# EAGLE board 2rfm69 (EAGLE 6.5.0)
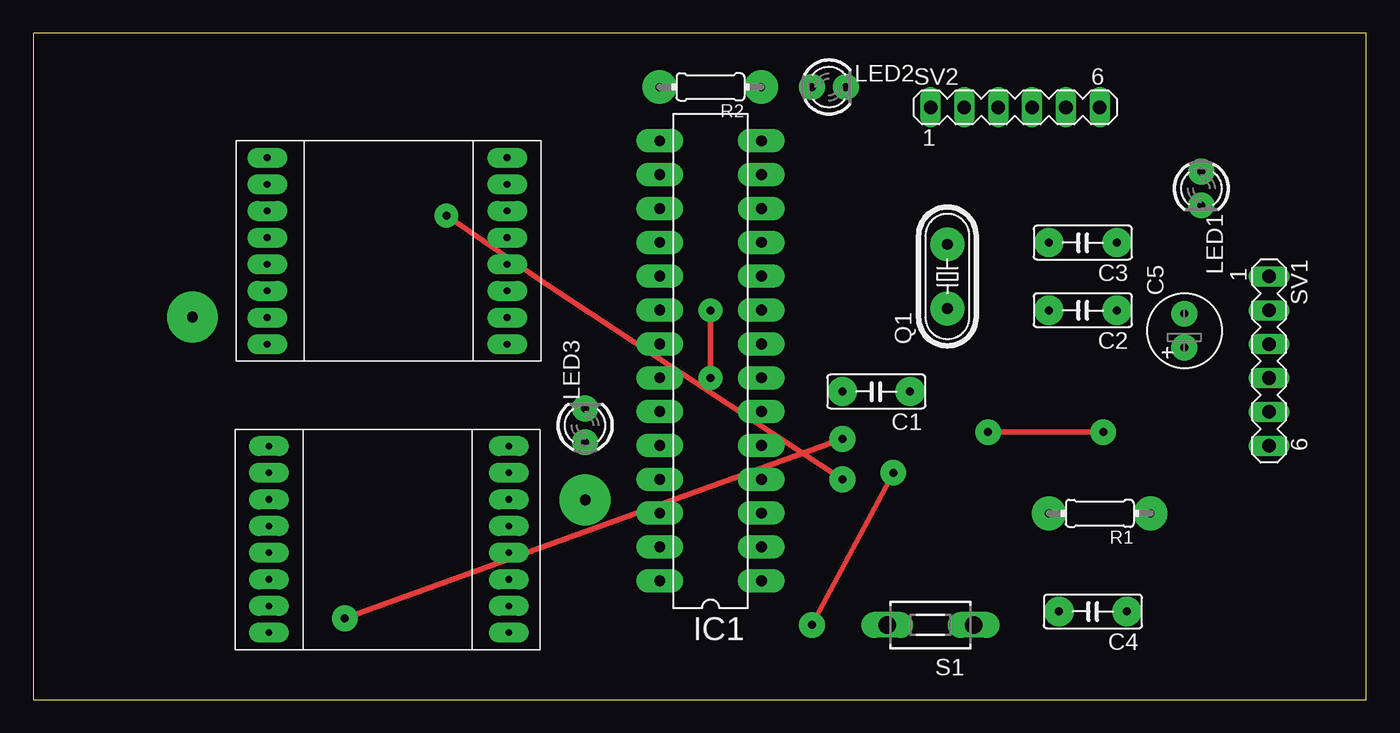
[diagram p0: board, top side]
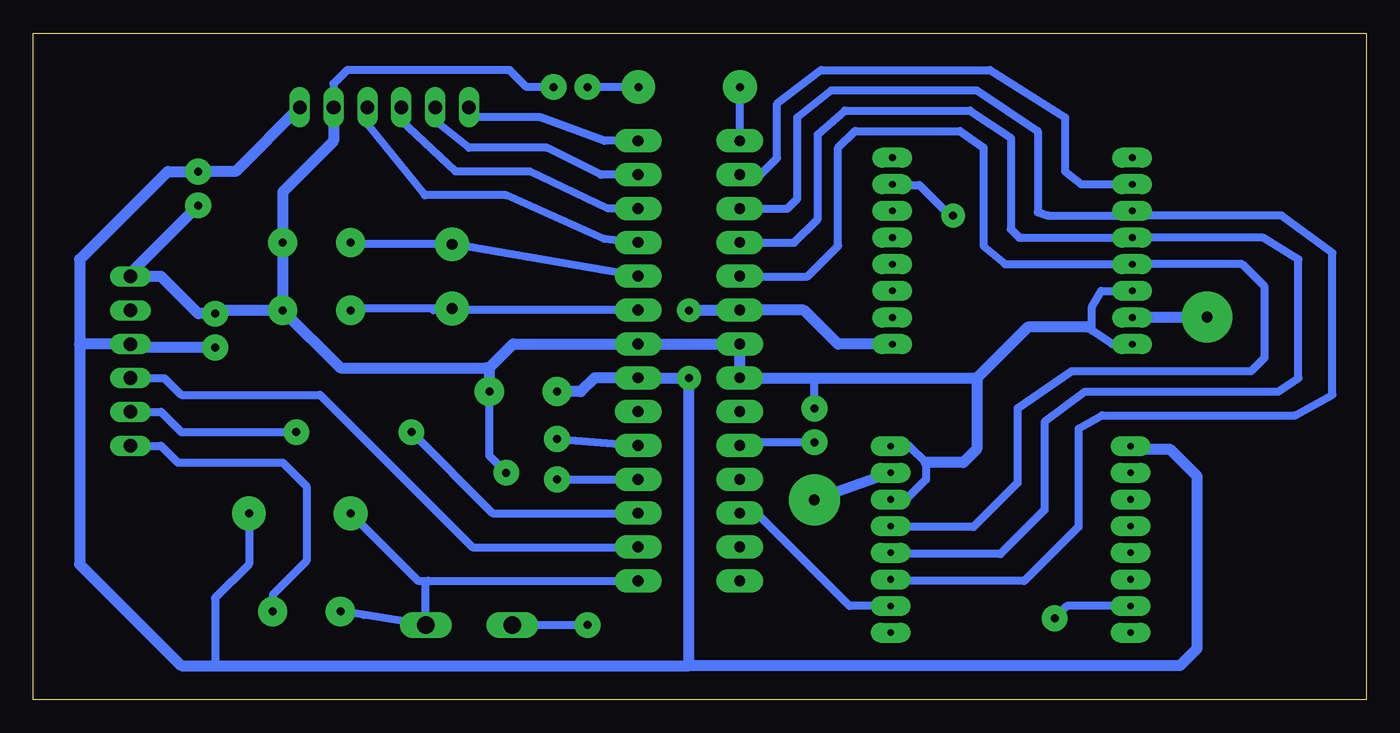
[diagram p1: board, bottom side, seen from below]

Size 100 x 50 mm. Coordinates in mm from the lower left corner, seen from the top.
Outline: 0,0 100,0 100,50 0,50 0,0
Copper layers (1*16): Top 0.035mm / dielectric 1.5mm / Bottom 0.035mm
Design rules "default": minimum track width 10mil, minimum drill 24mil, track to track 8mil, track to pad 8mil, pad to pad 8mil, via to via 8mil, smd to smd 8mil, copper to edge 40mil, drill to drill 8mil, minimum pad ring 10mil, minimum via ring 8mil, stop-mask expansion 4mil, vias tented up to drill 0mil, thermal gap 10mil

## Footprints (pad centres in the part's own frame; a part is rotated, then mirrored left to right if it is on the bottom)
C050-025X075 = drill 0.6 pad 2.184: 1 -2.54,0; 2 2.54,0
E2,5-6 = drill 0.6 pad 1.93: + -1.27,0; - 1.27,0
DIL28-3 = drill 0.813 pad 1.778 long: 1 -16.51,-3.81; 2 -13.97,-3.81; 3 -11.43,-3.81; 4 -8.89,-3.81; 5 -6.35,-3.81; 6 -3.81,-3.81; 7 -1.27,-3.81; 8 1.27,-3.81; 9 3.81,-3.81; 10 6.35,-3.81; 11 8.89,-3.81; 12 11.43,-3.81; 13 13.97,-3.81; 14 16.51,-3.81; 15 16.51,3.81; 16 13.97,3.81; 17 11.43,3.81; 18 8.89,3.81; 19 6.35,3.81; 20 3.81,3.81; 21 1.27,3.81; 22 -1.27,3.81; 23 -3.81,3.81; 24 -6.35,3.81; 25 -8.89,3.81; 26 -11.43,3.81; 27 -13.97,3.81; 28 -16.51,3.81
LED3MM = drill 0.6 pad 1.93: A -1.27,0; K 1.27,0
HC49/S = drill 0.813 pad 2.54: 1 -2.413,0; 2 2.413,0
0204/7 = drill 0.6 pad 2.54: 1 -3.81,0; 2 3.81,0
DTS-3 = drill 1.3 long: 1 -3.25,0; 2 3.25,0
MA06-1 = drill 1.016 long: 1 -6.35,0; 2 -3.81,0; 3 -1.27,0; 4 1.27,0; 5 3.81,0; 6 6.35,0
RFM69 = drill 0.5 pad 1.5 long: 1 -6.35,8.89; 2 -4.35,8.89; 3 -2.35,8.89; 4 -0.35,8.89; 5 1.65,8.89; 6 3.65,8.89; 7 5.65,8.89; 8 7.65,8.89; 9 7.65,-9.11; 10 5.65,-9.11; 11 3.65,-9.11; 12 1.65,-9.11; 13 -0.35,-9.11; 14 -2.35,-9.11; 15 -4.35,-9.11; 16 -6.35,-9.11
ANT = drill 0.8 pad 3.81: ANT 0,0

## Placement (x,y rotation side)
C1  0.1uF  [C050-025X075]  63.25,23.11 180 top
C2  22pF  [C050-025X075]  78.74,29.21 180 top
C3  22pF  [C050-025X075]  78.74,34.29 180 top
C4  0.1uF  [C050-025X075]  79.5,6.6 180 top
C5  10uF  [E2,5-6]  86.36,27.69 90 top
IC1  MEGA8-P  [DIL28-3]  50.81,25.42 90 top
LED1  [LED3MM]  87.63,38.35 270 top
LED2  [LED3MM]  59.69,45.97 0 top
LED3  [LED3MM]  41.4,20.57 90 top
Q1  16MHz  [HC49/S]  68.58,31.75 90 top
R1  10k  [0204/7]  80.01,13.97 180 top
R2  1k  [0204/7]  50.8,45.97 180 top
S1  DTS-3  [DTS-3]  67.31,5.59 180 top
SV1  [MA06-1]  92.71,25.4 270 top
SV2  [MA06-1]  73.66,44.45 0 top
U1  RFM692  [RFM69]  26.58,11.36 90 top
U2  RFM692  [RFM69]  26.66,34.31 270 top
U$1  ANT  [ANT]  11.94,28.7 0 top
U$2  ANT  [ANT]  41.4,14.99 0 top

## Library data of the parts
C1-C5 R1 R2 = rcl
IC1 = atmel; OC_FARNELL: unknown; OC_NEWARK: unknown
LED1-LED3 = led
Q1 = crystal; OC_FARNELL: 1667008; OC_NEWARK: unknown
S1 = switch-tact
SV1 SV2 = con-lstb; OC_FARNELL: unknown; OC_NEWARK: unknown
U1 U2 U$1 U$2 = rfm69

## Nets
+3V3: C1.2 C5.+ IC1.7 IC1.20 LED1.A R1.1 SV1.3 SV2.6 U1.8 U2.8
D0_RX: IC1.2 SV1.4
D1_TX: IC1.3 SV1.5
D2_INT2: IC1.4 U2.2
D3_INT1: IC1.5 U1.2
D5: IC1.11 SV2.4
D6: IC1.12 SV2.3
D7: IC1.13 SV2.2
D8: IC1.14 SV2.1
D9: IC1.15 R2.2
D10_SS2: IC1.16 U2.15
D11_MOSI: IC1.17 U1.14 U2.14
D12_MISO: IC1.18 U1.13 U2.13
D13_SCK: IC1.19 U1.12 U2.12
GND: C1.1 C2.1 C3.1 C5.- IC1.8 IC1.21 IC1.22 LED1.K LED2.K LED3.K S1.2 SV1.1 SV2.5 U1.9 U1.11 U2.9 U2.11
N$1: C2.2 IC1.9 Q1.1
N$2: C3.2 IC1.10 Q1.2
N$3: C4.1 SV1.6
N$4: U1.10 U$2.ANT
N$5: U2.10 U$1.ANT
N$6: LED2.A R2.1
N$7: IC1.24 LED3.A
RST: C4.2 IC1.1 R1.2 S1.1
SS1: IC1.26 U1.15

## Tracks (layer width: path | path; a pad name or v marks a point on that pad's centre or on a via)
+3V3  (via drill 0.6 pad 1.78)
  Top 0.406: v50.8,24.13 v50.8,29.21
  Bottom 0.406: U2.8 | U1.8 17.47,18.8 | 92.46,26.42 SV1.3 92.96,26.42 | IC1.7 54.6,24.13 | v50.8,29.21 50.53,29.23
  Bottom 0.61: R1.1 83.82,10.16 86.36,7.62 86.36,2.54
  Bottom 0.813: U2.8 39.62,26.67 42.18,29.23 IC1.20 50.53,29.23 | 17.47,18.8 14.73,18.8 12.7,16.76 12.7,3.81 13.97,2.54 50.8,2.54 | IC1.7 57.89,24.15 58.93,23.11 C1.2 | C5.+ 92.46,26.42 | 54.6,24.13 v50.8,24.13 50.8,2.54 | SV2.6 84.84,39.62 LED1.A 89.92,39.62 96.52,33.02 96.52,26.67 | 50.8,2.54 86.36,2.54 88.9,2.54 96.52,10.16 96.52,26.67 | SV1.3 96.52,26.67
D0_RX
  Bottom 0.406: 54.64,11.43 IC1.2
  Bottom 0.61: SV1.4 90.17,24.13 88.9,22.86 78.49,22.86 67.06,11.43 54.64,11.43
D1_TX  (via drill 0.6 pad 1.93)
  Top 0.406: v80.26,20.07 v71.63,20.07
  Bottom 0.406: 54.64,13.97 IC1.3
  Bottom 0.61: SV1.5 90.42,21.59 88.9,20.07 v80.26,20.07 | v71.63,20.07 65.53,13.97 54.64,13.97
D2_INT2  (via drill 0.6 pad 1.78, 0.6 pad 1.93)
  Top 0.406: v30.99,36.32 38.35,31.24 v60.71,16.51
  Bottom 0.406: U2.2 35.49,38.61 | 31.24,36.32 v30.99,36.32 | 54.64,16.51 IC1.4
  Bottom 0.61: 35.49,38.61 33.53,38.61 31.24,36.32 | v60.71,16.51 54.64,16.51
D3_INT1  (via drill 0.6 pad 1.93)
  Top 0.406: v23.37,6.1 v60.71,19.56
  Bottom 0.61: U1.2 22.45,7.01 v23.37,6.1 | v60.71,19.56 IC1.5
D5
  Bottom 0.406: 74.93,43.18 SV2.4
  Bottom 0.61: IC1.11 57.17,34.56 64.52,37.85 70.61,37.85 74.93,43.18
D6
  Bottom 0.406: 72.39,43.43 SV2.3
  Bottom 0.61: IC1.12 56.91,36.85 62.74,39.62 68.33,39.62 72.39,43.43
D7
  Bottom 0.406: 69.85,43.43 SV2.2
  Bottom 0.61: IC1.13 57.42,39.39 61.47,41.4 67.31,41.4 69.85,43.43
D8
  Bottom 0.406: 67.31,43.69 67.56,43.94 67.56,44.2 SV2.1
  Bottom 0.61: IC1.14 57.17,41.93 61.98,43.69 67.31,43.69
D9
  Bottom 0.406: 47,46.98 R2.2 | IC1.15
  Bottom 0.61: IC1.15 R2.2
D10_SS2
  Bottom 0.406: IC1.16 46.98,39.37 45.47,39.37
  Bottom 0.61: 45.47,39.37 44.2,40.64 44.2,44.7 40.89,47.24 28.19,47.24 22.61,43.69 22.61,39.62 21.39,38.66 U2.15
D11_MOSI
  Bottom 0.406: IC1.17 46.98,36.83 | 17.02,36.32 17.36,36.66 U2.14 | 35.56,8.89 U1.14
  Bottom 0.61: 46.98,36.83 43.43,36.83 42.67,37.59 42.67,43.69 40.13,45.72 29.21,45.72 24.64,42.67 24.64,36.58 23.88,36.32 17.02,36.32 6.35,36.32 2.54,33.53 2.54,22.86 5.33,21.34 19.81,21.34 21.59,20.32 21.59,12.95 25.65,8.89 35.56,8.89
D12_MISO
  Bottom 0.406: 46.98,34.29 IC1.18 46.99,34.3 46.99,34.29 | 35.59,10.92 U1.13
  Bottom 0.61: 46.98,34.29 42.93,34.29 41.15,36.07 41.15,42.42 39.12,44.2 29.72,44.2 26.67,42.16 26.67,35.31 26.03,34.66 U2.13 7.74,34.66 5.08,33.02 5.08,24.13 6.6,23.11 21.08,23.11 24.13,20.83 24.13,14.22 27.43,10.92 35.59,10.92
D13_SCK
  Bottom 0.406: IC1.19 46.98,31.75 | 35.63,12.95 U1.12
  Bottom 0.61: 46.98,31.75 41.91,31.75 39.62,34.04 39.62,41.4 38.35,42.67 30.48,42.67 28.7,41.4 28.7,34.04 27.08,32.66 U2.12 9.3,32.66 7.62,30.99 7.62,25.65 8.64,24.64 22.1,24.64 26.16,21.84 26.16,16.26 29.46,12.95 35.63,12.95
GND  (via drill 0.6 pad 1.93)
  Top 0.406: v58.42,5.59 v64.52,17.02
  Bottom 0.406: U2.9 19.05,26.67 | U1.9 35.65,19.05 34.29,19.05 | 34.52,15.01 U1.11 | IC1.22 46.98,24.13 | 20.57,27.69 20.83,27.94 | 65.79,24.64 65.91,24.77 66.04,24.89 | SV1.1 92.71,32 | 86.11,29.21 C5.- | 41.4,23.88 41.66,24.13
  Bottom 0.61: 19.05,26.67 20.57,27.69 20.57,29.46 19.88,30.66 U2.11 | 34.29,19.05 33.02,17.78 33.02,16.51 34.52,15.01 | S1.2 v58.42,5.59 | v64.52,17.02 65.79,18.29 C1.1 | LED2.K 62.99,45.97 64.26,47.24 76.45,47.24 77.47,46.23 SV2.5 | LED3.K 41.4,23.88
  Bottom 0.813: 66.04,24.89 76.96,24.89 C2.1 | IC1.22 IC1.21 IC1.8 63.99,26.69 65.91,24.77 | 33.02,17.78 30.23,17.78 29.21,18.8 29.21,24.13 | 46.98,24.13 41.66,24.13 29.21,24.13 | 20.83,27.94 25.4,27.94 29.21,24.13 | C1.1 65.79,24.64 | 92.71,32 LED1.K | C2.1 C3.1 81.28,38.1 77.47,41.91 SV2.5 | C2.1 86.11,29.21 | C5.- 87.63,28.96 90.42,31.75 SV1.1
N$1
  Bottom 0.406: 76.07,29.34 C2.2 | 70,29.23 Q1.1
  Bottom 0.61: Q1.1 76.07,29.34 | IC1.9 70,29.23
N$2
  Bottom 0.406: 76.07,34.16 C3.2
  Bottom 0.61: 76.07,34.16 Q1.2 IC1.10
N$3
  Bottom 0.61: C4.1 82.04,7.87 79.5,10.41 79.5,16 81.28,17.78 89.15,17.78 90.42,19.05 SV1.6
N$4
  Bottom 0.813: U1.10 U$2.ANT
N$5
  Bottom 0.406: U2.10 17.51,28.7
  Bottom 0.813: 17.51,28.7 U$1.ANT
N$6
  Bottom 0.61: R2.1 LED2.A
N$7
  Bottom 0.406: 46.77,19.3 IC1.24
  Bottom 0.61: LED3.A 46.77,19.3
RST
  Bottom 0.61: R1.2 71.14,8.91 70.36,8.91 | 70.36,8.91 IC1.1 | C4.2 75.18,6.35 S1.1 70.56,8.71 70.36,8.91
SS1
  Bottom 0.406: 46.77,14.22 IC1.26
  Bottom 0.61: U1.15 38.76,7.01 45.97,14.22 46.77,14.22